# Altium PCB main_2.PcbDoc
Units mil, origin at the board's own origin, x right, y up, seen from the top; angles counter-clockwise.
Board outline 6000 x 4000 mil, 2 copper layers (Top Layer, Bottom Layer); 82 components, 163 nets, 538 pads, 14 vias.
Unrouted connection lines stored in the file: 2.
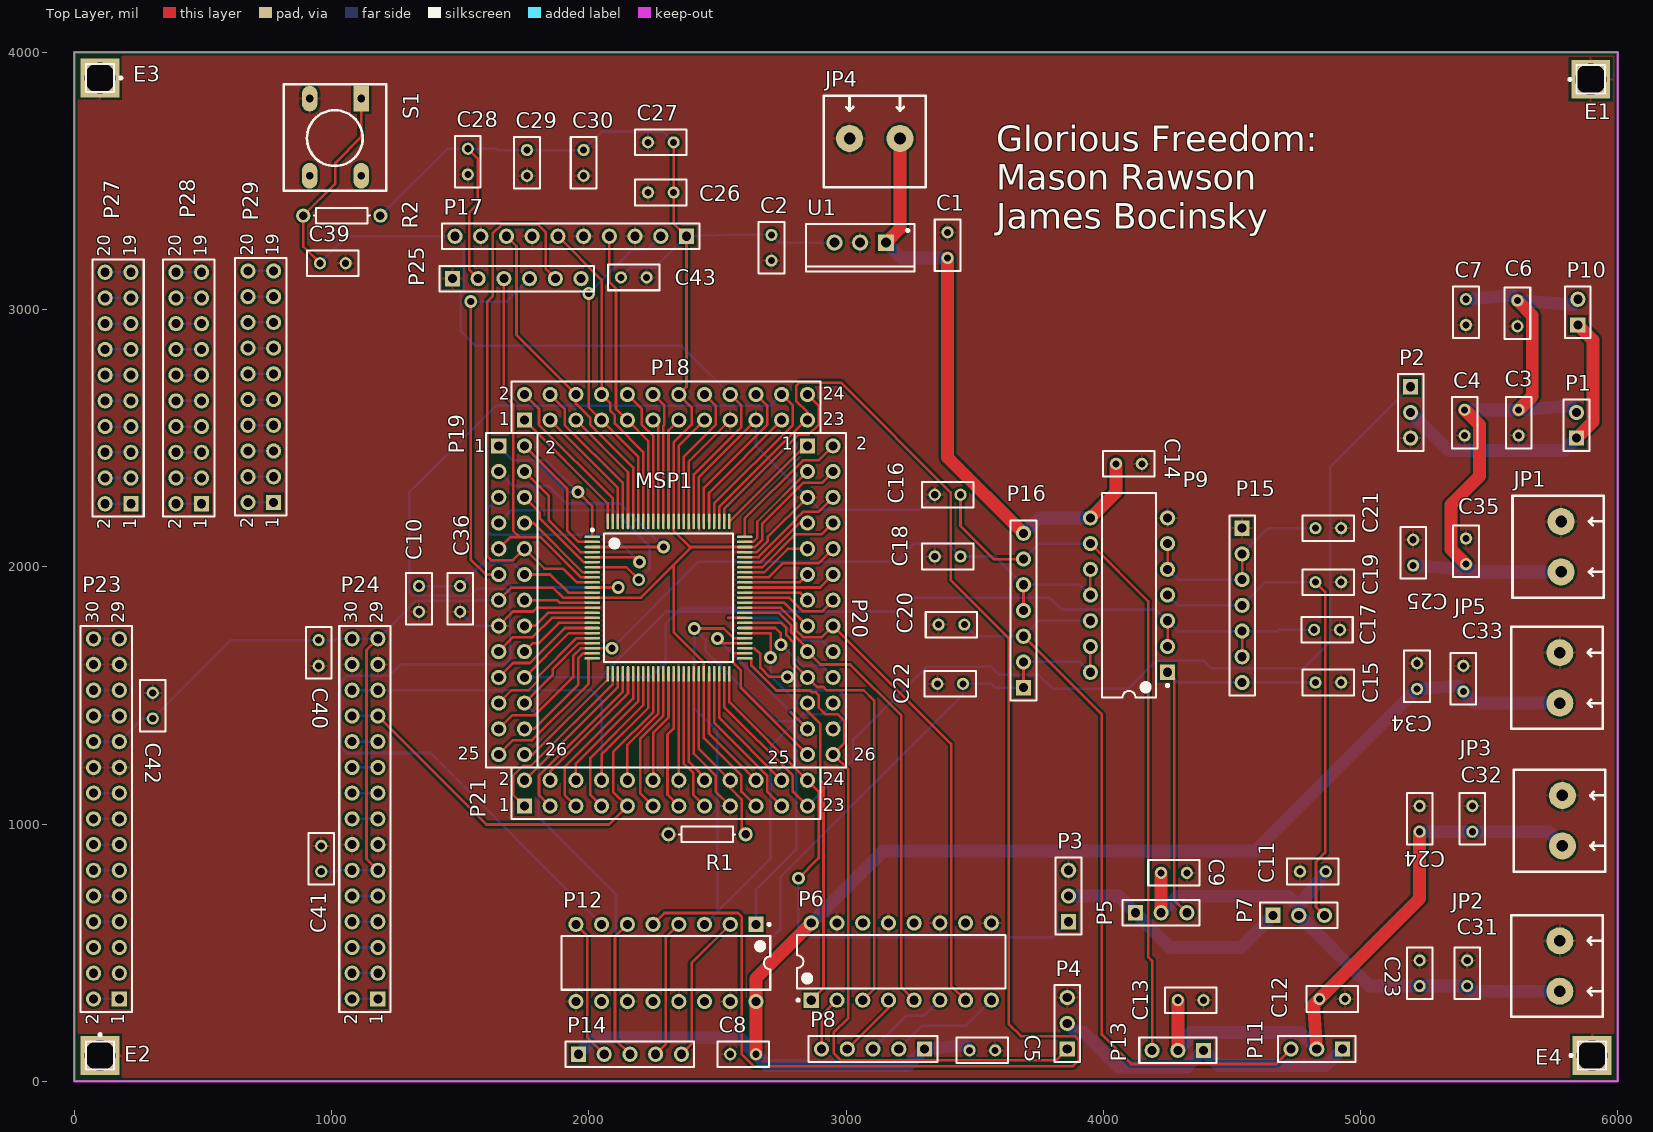
[diagram p0: Top Layer view]
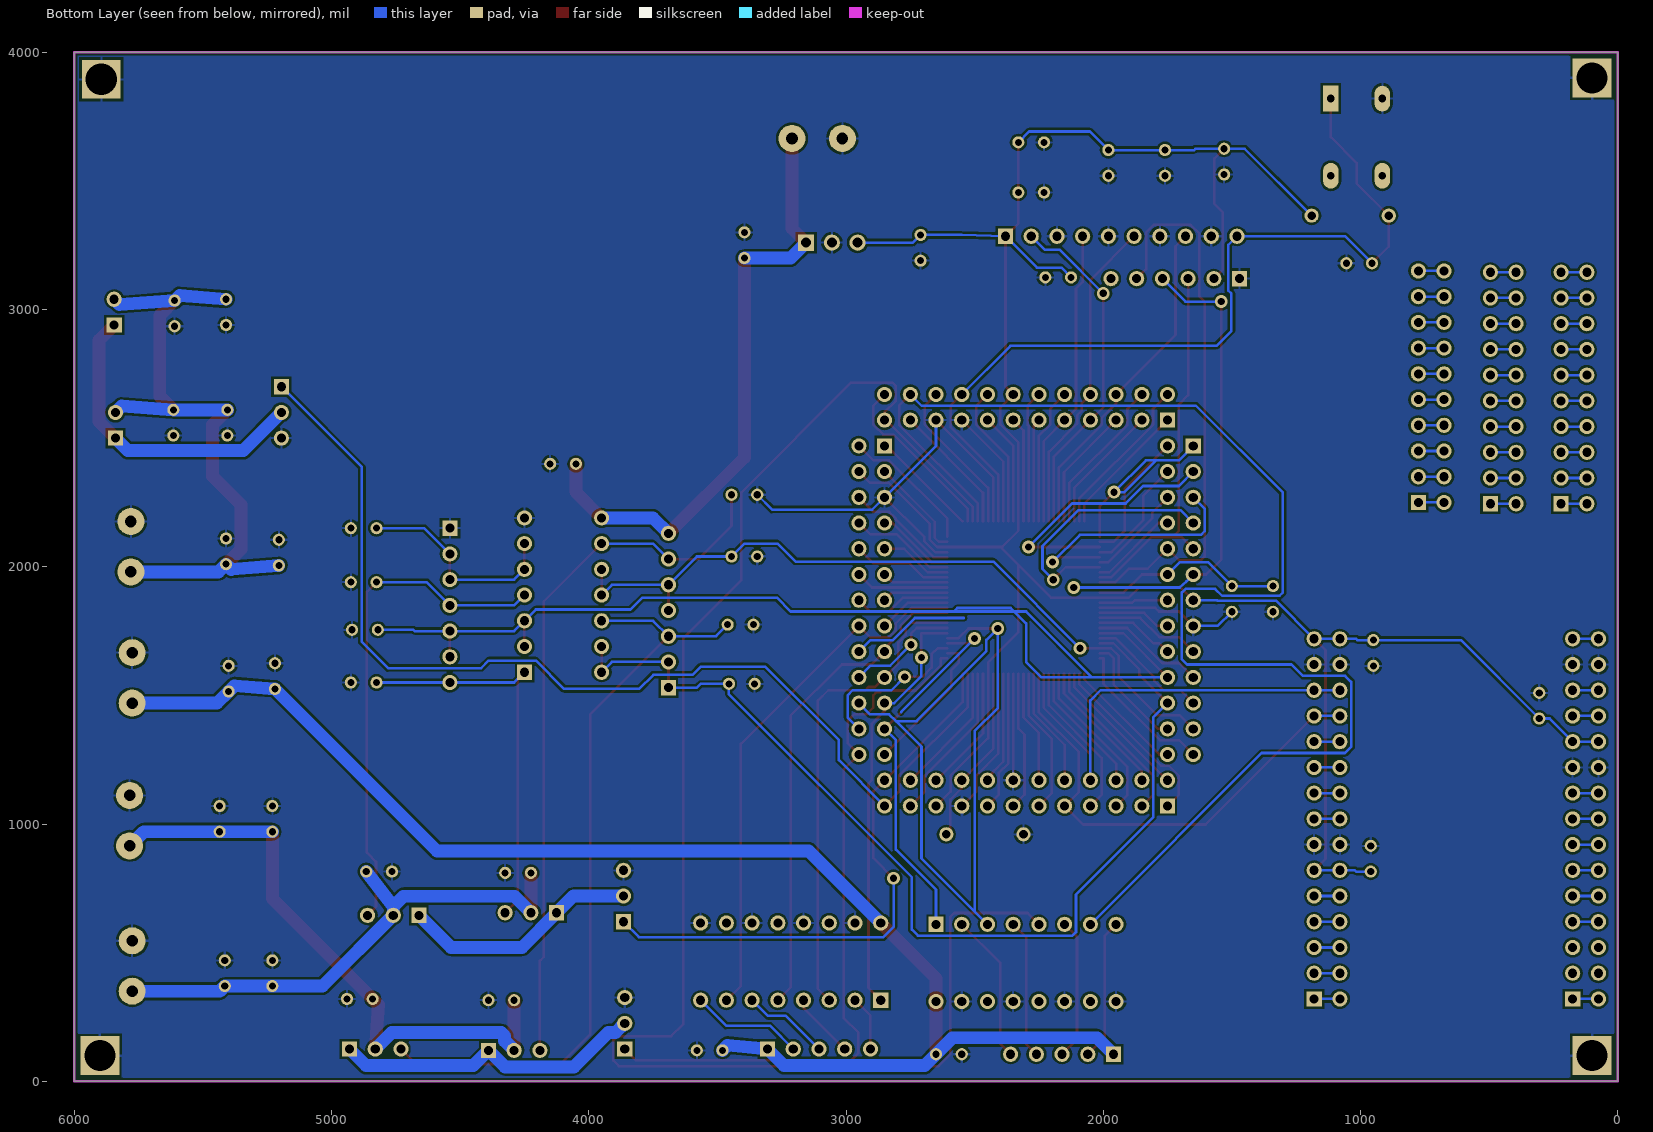
[diagram p1: Bottom Layer view, seen from below]

## Layer stack, top to bottom
Top Solder: solder mask 0.4, Solder Resist, Dk 3.5
Top Layer: signal copper 1.4
Dielectric 1: dielectric 12.6, FR-4, Dk 4.8
Bottom Layer: signal copper 1.4
Bottom Solder: solder mask 0.4, Solder Resist, Dk 3.5

## Board outline
0,0 6000,0 6000,4000 0,4000

## Design rules (kind name [scope] priority, off if disabled: settings)
Clearance CopperPour [inPolyGon] p1: gap=9
Clearance [All] p2: gap=9
ComponentClearance [All] p1: gap=-1 collisioncheckmode=3 verticalgap=10 showdistances=TRUE
PolygonConnect [All] p1: connectstyle=Relief reliefconductorwidth=10 reliefentries=4 polygonreliefangle="90 Angle" airgapwidth=10
RoutingVias [All] p1: holewidth=28 width=50 viastyle="Through Hole" minholewidth=28 minwidth=50 maxholewidth=28 maxwidth=50
SolderMaskExpansion [All] p1: expansion=4
Width "Schematic Width Constraint_6" [InNet('6V_S')] p1: maxlimit=50 minlimit=50 preferedwidth=50
Width "Schematic Width Constraint_5" [InNet('6V_1_F')] p2: maxlimit=50 minlimit=50 preferedwidth=50
Width "Schematic Width Constraint_3" [InNet('6V_1')] p3: maxlimit=50 minlimit=50 preferedwidth=50
Width "Schematic Width Constraint_2" [InNet('6V_0_F')] p4: maxlimit=50 minlimit=50 preferedwidth=50
Width "Schematic Width Constraint_1" [InNet('4V5_F')] p5: maxlimit=50 minlimit=50 preferedwidth=50
Width "Schematic Width Constraint" [InNet('4V5')] p6: maxlimit=50 minlimit=50 preferedwidth=50
Width "Schematic Width Constraint_7" [InNet('6V_L')] p7: maxlimit=50 minlimit=50 preferedwidth=50
Width "Schematic Width Constraint_4" [InNet('6V_0')] p8: maxlimit=50 minlimit=50 preferedwidth=50
Width [All] p9: maxlimit=10 minlimit=9 preferedwidth=10
29 further rules are at their usual default settings.

## Classes and differential pairs
component class power: C1 C2 C3 C4 C5 C6 C7 C8 C9 C11 C12 C13 C14 C15 C16 C17 C18 C19 C20 C21 C22 C23 C24 C25 C31 C32 C33 C34 C35 JP1 JP2 JP3 JP4 JP5 P1 P2 P3 P4 P5 P6 P7 P8 P9 P10 P11 P12 P13 P14 U1
component class logic: C10 C26 C27 C28 C29 C30 C36 C39 MSP1 R1 R2 S1
component class comm: C40 C41 C42 C43 P23 P24 P25
component class breakout: E1 E2 E3 E4 P15 P16 P17 P18 P19 P20 P21 P27 P28 P29

## Components (designator, comment, footprint, x,y, rotation, side; value= is the part's Value field where it differs from the comment)
C1 "Cap2" RAD-0.1 3395,3250 r90 top
C2 "Cap2" RAD-0.1 2710,3240 r270 top
C3 "Cap" RAD-0.1 5615,2560 r90 top
C4 "Cap" RAD-0.1 5405,2560 r270 top
C5 "Cap" RAD-0.1 3530,120 r180 top
C6 "Cap" RAD-0.1 5610,2985 r90 top
C7 "Cap" RAD-0.1 5410,2990 r270 top
C8 "Cap" RAD-0.1 2600,105 r0 top
C9 "Cap" RAD-0.1 4275,810 r180 top
C10 "Cap" RAD-0.1 1340,1875 r90 top
C11 "Cap" RAD-0.1 4815,815 r0 top
C12 "Cap" RAD-0.1 4890,320 r180 top
C13 "Cap" RAD-0.1 4340,315 r180 top
C14 "Cap" RAD-0.1 4100,2400 r180 top
C15 "Cap" RAD-0.1 4875,1550 r0 top
C16 "Cap" RAD-0.1 3395,2280 r0 top
C17 "Cap" RAD-0.1 4870,1755 r0 top
C18 "Cap" RAD-0.1 3395,2040 r0 top
C19 "Cap" RAD-0.1 4875,1940 r0 top
C20 "Cap" RAD-0.1 3410,1775 r0 top
C21 "Cap" RAD-0.1 4875,2150 r0 top
C22 "Cap" RAD-0.1 3405,1545 r0 top
C23 "Cap" RAD-0.1 5230,420 r270 top
C24 "Cap" RAD-0.1 5230,1020 r270 top
C25 "Cap" RAD-0.1 5205,2055 r270 top
C26 "Cap" RAD-0.1 2280,3455 r0 top
C27 "Cap" RAD-0.1 2280,3650 r0 top
C28 "Cap" RAD-0.1 1530,3575 r90 top
C29 "Cap" RAD-0.1 1760,3570 r90 top
C30 "Cap" RAD-0.1 1980,3570 r90 top
C31 "Cap" RAD-0.1 5415,420 r270 top
C32 "Cap" RAD-0.1 5435,1020 r270 top
C33 "Cap" RAD-0.1 5400,1565 r270 top
C34 "Cap" RAD-0.1 5220,1575 r270 top
C35 "Cap" RAD-0.1 5410,2060 r270 top
C36 "Cap" RAD-0.1 1500,1875 r90 top
C39 "Cap" RAD-0.1 1005,3180 r180 top
C40 "Cap" RAD-0.1 950,1665 r90 top
C41 "Cap" RAD-0.1 960,865 r270 top
C42 "Cap" RAD-0.1 305,1460 r270 top
C43 "Cap" RAD-0.1 2174.98,3125 r180 top
E1 "mount" PIN1 5895,3895 r90 top
E2 "mount" PIN1 100,100 r0 top
E3 "mount" PIN1 100,3900 r270 top
E4 "mount" PIN1 5900,100 r90 top
JP1 "gunPower" CON2screw 5780,1980 r90 top
JP2 "turretPower_0" CON2screw 5775,350 r90 top
JP3 "turretPower_1" CON2screw 5785,915 r90 top
JP4 "logicPower" CON2screw 3210,3665 r180 top
JP5 "stepperPower" CON2screw 5775,1470 r90 top
MSP1 "MSP432" PZ100_L 2310,1880 r0 top
P1 "gun_0" HDR1X2 5840,2500 r90 top
P2 "gunFet" HDR1X3 5195,2700 r270 top
P3 "turrFet_0" HDR1X3 3865,620 r90 top
P4 "turrFet_1" HDR1X3 3860,125 r90 top
P5 "pt_0" HDR1X3 4125,655 r0 top
P6 "ULN2003_0" DIP-16 3215,465 r90 top
P7 "pt_1" HDR1X3 4660,645 r0 top
P8 "stepper_0" HDR1X5 3305,125 r180 top
P9 "PWM_driver" DIP-14 4100,1890 r180 top
P10 "gun_1" HDR1X2 5845,2940 r90 top
P11 "pt_2" HDR1X3 4930,125 r180 top
P12 "ULN2003_1" DIP-16 2300,460 r270 top
P13 "pt_3" HDR1X3 4390,120 r180 top
P14 "stepper_1" HDR1X5 1960,105 r0 top
P15 "pwm_header_0" HDR1X7 4540,2150 r270 top
P16 "pwm_header_1" HDR1X7 3690,1530 r90 top
P17 "Programmer" HDR1X10 2379.98,3285 r180 top
P18 "Header 12X2" HDR2X12 1750,2570 r0 top
P19 "Header 13X2" HDR2X13 1650,2470 r270 top
P20 "Header 13X2" HDR2X13 2850,2470 r270 top
P21 "Header 12X2" HDR2X12 1750,1070 r0 top
P23 "wifi_L" HDR2X15 175,320 r90 top
P24 "wifi_R" HDR2X15 1180,320 r90 top
P25 "spi_bbgw" HDR1X6 1469.98,3120 r0 top
P27 "proto_0" HDR2X10 220,2245 r90 top
P28 "proto_1" HDR2X10 495,2245 r90 top
P29 "proto_2" HDR2X10 775,2250 r90 top
R1 "Res1" AXIAL-0.3 2460,960 r0 top
R2 "Res1" AXIAL-0.3 1040,3365 r0 top
S1 "SW-PB" "SW PB" 1115,3820 r270 top
U1 "LM2940CT-3.3" T03B 3055,3260 r180 top

## Footprints (in the part's own frame and the unit in brackets; to place one, negate y for a bottom-side part, rotate by r counter-clockwise, add the part's x,y. Pads: shape width x height; smd on the part's side, far side on the other; paste and mask are expansions set on the pad)
AXIAL-0.3 [mm] "Axial Device, Thru-Hole; 2 Leads; 0.3 in Pin Spacing"
  round 1.4 hole 0.85: 1(-3.81,0) 2(3.81,0)
  silkscreen extent -2.77,-0.76 2.77,0.76
CON2screw [mil]
  round 105 hole 45: 1(0,0) 2(196,0)
  silkscreen extent -100,-166 296,189
DIP-14 [mm] "DIP; 14 Leads; Row Spacing 7.62 mm; Pitch 2.54 mm"
  rect 1.5x1.5 hole 0.9: 1(-3.81,7.62)
  round 1.5 hole 0.9: 2(-3.81,5.08) 3(-3.81,2.54) 4(-3.81,0) 5(-3.81,-2.54) 6(-3.81,-5.08) 7(-3.81,-7.62) 8(3.81,-7.62) 9(3.81,-5.08) 10(3.81,-2.54) 11(3.81,0) 12(3.81,2.54) 13(3.81,5.08) 14(3.81,7.62)
  silkscreen extent -3.94,-10.1 2.65,10.1, body extent -3.6,-10.1 3.6,10.1, height 5.08
DIP-16 [mm] "DIP; 16 Leads; Row Spacing 7.62 mm; Pitch 2.54 mm"
  rect 1.5x1.5 hole 0.9: 1(-3.81,8.89)
  round 1.5 hole 0.9: 2(-3.81,6.35) 3(-3.81,3.81) 4(-3.81,1.27) 5(-3.81,-1.27) 6(-3.81,-3.81) 7(-3.81,-6.35) 8(-3.81,-8.89) 9(3.81,-8.89) 10(3.81,-6.35) 11(3.81,-3.81) 12(3.81,-1.27) 13(3.81,1.27) 14(3.81,3.81) 15(3.81,6.35) 16(3.81,8.89)
  silkscreen extent -3.93,-10.3 2.65,10.31, body extent -3.6,-10.28 3.6,10.28, height 5.08
HDR1X2 [mm] "Connector; Header; 2 Position"
  rect 1.5x1.5 hole 0.9: 1(0,0)
  round 1.5 hole 0.9: 2(2.54,0)
  silkscreen extent -1.27,-1.27 3.81,1.27
HDR1X3 [mm] "Connector; Header; 3 Position"
  rect 1.5x1.5 hole 0.9: 1(0,0)
  round 1.5 hole 0.9: 2(2.54,0) 3(5.08,0)
  silkscreen extent -1.27,-1.27 6.35,1.27
HDR1X5 [mm] "Connector; Header; 5 Position"
  rect 1.5x1.5 hole 0.9: 1(0,0)
  round 1.5 hole 0.9: 2(2.54,0) 3(5.08,0) 4(7.62,0) 5(10.16,0)
  silkscreen extent -1.27,-1.27 11.43,1.27
HDR1X6 [mm] "Connector; Header; 6 Position"
  rect 1.5x1.5 hole 0.9: 1(0,0)
  round 1.5 hole 0.9: 2(2.54,0) 3(5.08,0) 4(7.62,0) 5(10.16,0) 6(12.7,0)
  silkscreen extent -1.27,-1.27 13.97,1.27
HDR1X7 [mm] "Connector; Header; 7 Position"
  rect 1.5x1.5 hole 0.9: 1(0,0)
  round 1.5 hole 0.9: 2(2.54,0) 3(5.08,0) 4(7.62,0) 5(10.16,0) 6(12.7,0) 7(15.24,0)
  silkscreen extent -1.27,-1.27 16.51,1.27
HDR1X10 [mm] "Connector; Header; 10 Position"
  rect 1.5x1.5 hole 0.9: 1(0,0)
  round 1.5 hole 0.9: 2(2.54,0) 3(5.08,0) 4(7.62,0) 5(10.16,0) 6(12.7,0) 7(15.24,0) 8(17.78,0) 9(20.32,0) 10(22.86,0)
  silkscreen extent -1.27,-1.27 24.13,1.27
HDR2X10 [mm] "Connector; Header; 10x2 Position"
  rect 1.5x1.5 hole 0.9: 1(0,0)
  round 1.5 hole 0.9: 2(0,2.54) 3(2.54,0) 4(2.54,2.54) 5(5.08,0) 6(5.08,2.54) 7(7.62,0) 8(7.62,2.54) 9(10.16,0) 10(10.16,2.54) 11(12.7,0) 12(12.7,2.54) 13(15.24,0) 14(15.24,2.54) 15(17.78,0) 16(17.78,2.54) 17(20.32,0) 18(20.32,2.54) 19(22.86,0) 20(22.86,2.54)
  silkscreen extent -1.27,-1.27 24.13,3.81
HDR2X12 [mm] "Connector; Header; 12x2 Position"
  rect 1.5x1.5 hole 0.9: 1(0,0)
  round 1.5 hole 0.9: 2(0,2.54) 3(2.54,0) 4(2.54,2.54) 5(5.08,0) 6(5.08,2.54) 7(7.62,0) 8(7.62,2.54) 9(10.16,0) 10(10.16,2.54) 11(12.7,0) 12(12.7,2.54) 13(15.24,0) 14(15.24,2.54) 15(17.78,0) 16(17.78,2.54) 17(20.32,0) 18(20.32,2.54) 19(22.86,0) 20(22.86,2.54) 21(25.4,0) 22(25.4,2.54) 23(27.94,0) 24(27.94,2.54)
  silkscreen extent -1.27,-1.27 29.21,3.81
HDR2X13 [mm] "Connector; Header; 13x2 Position"
  rect 1.5x1.5 hole 0.9: 1(0,0)
  round 1.5 hole 0.9: 2(0,2.54) 3(2.54,0) 4(2.54,2.54) 5(5.08,0) 6(5.08,2.54) 7(7.62,0) 8(7.62,2.54) 9(10.16,0) 10(10.16,2.54) 11(12.7,0) 12(12.7,2.54) 13(15.24,0) 14(15.24,2.54) 15(17.78,0) 16(17.78,2.54) 17(20.32,0) 18(20.32,2.54) 19(22.86,0) 20(22.86,2.54) 21(25.4,0) 22(25.4,2.54) 23(27.94,0) 24(27.94,2.54) 25(30.48,0) 26(30.48,2.54)
  silkscreen extent -1.27,-1.27 31.75,3.81
HDR2X15 [mm] "Connector; Header; 15x2 Position"
  rect 1.5x1.5 hole 0.9: 1(0,0)
  round 1.5 hole 0.9: 2(0,2.54) 3(2.54,0) 4(2.54,2.54) 5(5.08,0) 6(5.08,2.54) 7(7.62,0) 8(7.62,2.54) 9(10.16,0) 10(10.16,2.54) 11(12.7,0) 12(12.7,2.54) 13(15.24,0) 14(15.24,2.54) 15(17.78,0) 16(17.78,2.54) 17(20.32,0) 18(20.32,2.54) 19(22.86,0) 20(22.86,2.54) 21(25.4,0) 22(25.4,2.54) 23(27.94,0) 24(27.94,2.54) 25(30.48,0) 26(30.48,2.54) 27(33.02,0) 28(33.02,2.54) 29(35.56,0) 30(35.56,2.54)
  silkscreen extent -1.27,-1.27 36.83,3.81
PIN1 [mm] "Generic Antenna; 1 Lead"
  rect 3.81x3.81 hole 3.1: 1(0,0)
  silkscreen extent -1.4,-1.4 1.4,2.17
PZ100_L [mm] "100-Pin Thin Quad Flat Pack 0.5 mm Pitch, IPC High Density"
  oval 1.55x0.25 smd: 1(-7.525,6) 2(-7.525,5.5) 3(-7.525,5) 4(-7.525,4.5) 5(-7.525,4) 6(-7.525,3.5) 7(-7.525,3) 8(-7.525,2.5) 9(-7.525,2) 10(-7.525,1.5) 11(-7.525,1) 12(-7.525,0.5) 13(-7.525,0) 14(-7.525,-0.5) 15(-7.525,-1) 16(-7.525,-1.5) 17(-7.525,-2) 18(-7.525,-2.5) 19(-7.525,-3) 20(-7.525,-3.5) 21(-7.525,-4) 22(-7.525,-4.5) 23(-7.525,-5) 24(-7.525,-5.5) 25(-7.525,-6) 51(7.525,-6) 52(7.525,-5.5) 53(7.525,-5) 54(7.525,-4.5) 55(7.525,-4) 56(7.525,-3.5) 57(7.525,-3) 58(7.525,-2.5) 59(7.525,-2) 60(7.525,-1.5) 61(7.525,-1) 62(7.525,-0.5) 63(7.525,0) 64(7.525,0.5) 65(7.525,1) 66(7.525,1.5) 67(7.525,2) 68(7.525,2.5) 69(7.525,3) 70(7.525,3.5) 71(7.525,4) 72(7.525,4.5) 73(7.525,5) 74(7.525,5.5) 75(7.525,6)
  oval 0.25x1.55 smd: 26(-6,-7.525) 27(-5.5,-7.525) 28(-5,-7.525) 29(-4.5,-7.525) 30(-4,-7.525) 31(-3.5,-7.525) 32(-3,-7.525) 33(-2.5,-7.525) 34(-2,-7.525) 35(-1.5,-7.525) 36(-1,-7.525) 37(-0.5,-7.525) 38(0,-7.525) 39(0.5,-7.525) 40(1,-7.525) 41(1.5,-7.525) 42(2,-7.525) 43(2.5,-7.525) 44(3,-7.525) 45(3.5,-7.525) 46(4,-7.525) 47(4.5,-7.525) 48(5,-7.525) 49(5.5,-7.525) 50(6,-7.525) 76(6,7.525) 77(5.5,7.525) 78(5,7.525) 79(4.5,7.525) 80(4,7.525) 81(3.5,7.525) 82(3,7.525) 83(2.5,7.525) 84(2,7.525) 85(1.5,7.525) 86(1,7.525) 87(0.5,7.525) 88(0,7.525) 89(-0.5,7.525) 90(-1,7.525) 91(-1.5,7.525) 92(-2,7.525) 93(-2.5,7.525) 94(-3,7.525) 95(-3.5,7.525) 96(-4,7.525) 97(-4.5,7.525) 98(-5,7.525) 99(-5.5,7.525) 100(-6,7.525)
  silkscreen extent -7.65,-6.35 6.35,6.8, body extent -7,-7 7,7, height 1.6
RAD-0.1 [mm] "Radial Cap, Thru-Hole; 2 Leads; 0.1 in Pin Spacing"
  round 1.2 hole 0.7: 1(-1.27,0) 2(1.27,0)
  silkscreen extent -2.54,-1.27 2.54,1.27
"SW PB" [mil]
  rect 100x60 hole 30: 1(0,0)
  oval 100x60 hole 30: 2(0,-200) 3(300,-200) 4(300,0)
  silkscreen extent -55,-302 358,98
T03B [mm]
  rect 1.6x1.6 hole 1: 1(-2.54,0)
  round 1.6 hole 1: 2(0,0) 3(2.54,0)
  silkscreen extent -5.35,-1.85 5.35,2.85, body extent -5.4,-1.9 5.4,2.9, height 19.4

## Part data
C1 C2 C3 C4 C5 C6 C7 C8 C9 C10 C11 C12 C13 C14 C15 C16 C17 C18 C19 C20 C21 C22 C23 C24 C25 C26 C27 C28 C29 C30 C31 C32 C33 C34 C35 C36 C39 C40 C41 C42 C43: "Capacitor"
E1 E2 E3 E4: library part Antenna, "Generic Antenna"
JP1 JP2 JP3 JP4 JP5: library part Power
P1 P10: library part "Header 2", "Header, 2-Pin"
P2 P3 P4 P5 P7 P11 P13: library part "Header 3", "Header, 3-Pin"
P6 P12: library part "Header 8X2", "Header, 8-Pin, Dual row"
P8 P14: library part "Header 5", "Header, 5-Pin"
P9: library part "Header 7X2A", "Header, 7-Pin, Dual row"
P15 P16: library part "Header 7", "Header, 7-Pin"
P17: library part "Header 10", "Header, 10-Pin"
P18 P21: "Header, 12-Pin, Dual row"
P19 P20: "Header, 13-Pin, Dual row"
P23 P24: library part "Header 15X2", "Header, 15-Pin, Dual row"
P25: library part "Header 6", "Header, 6-Pin"
P27 P28 P29: library part "Header 10X2", "Header, 10-Pin, Dual row"
R1 R2: "Resistor"
S1: library part SW-PB_2, "DIGIKEY SW400-ND"
U1: library part LM2940CT-5.0, "1A Low Dropout Regulator, 3-pin TO-220"

## Via types
v1: diameter 50, hole 28, Top Layer to Bottom Layer, 14 vias

## Nets (pads, with @x,y where several pads share a name; then routed paths per layer and width w, separated by ;. In a path a pad name is that pad's centre, name@x,y a point inside that pad or via, vN(x,y) a via of type N, cw(c..) or ccw(c..) an arc to the next point about the centre after c; other vN are vias at no path point)
4V5: C3.2 C4.1 C6.2 C7.1 C25.2 C35.2 JP1.1 P1.2 P10.2 | length 2660.2
  Top Layer w50: C4.1 5463,2552 5463,2352 5352,2241 5352,2068 C35.2 ; C6.2 5668,2977 5668,2663 C3.2
  Bottom Layer w50: C25.2 5390,1990 C35.2 5440,1980 JP1.1 ; C4.1 C3.2 5815.5,2624.5 P1.2 ; C7.1 5590,3055 C6.2 5824,3019 P10.2
4V5_F: P1.1 P2.2 P10.1 | length 1217.1
  Top Layer w50: P1.1 5904,2564 5904,2881 P10.1
  Bottom Layer w50: P2.2 5343,2452 5792,2452 P1.1
6V_0: C9.2 C11.2 C23.2 C31.2 JP2.1 P5.2 P7.2 | length 2076.1
  Top Layer w50: P5.2 C9.2
  Bottom Layer w50: P5.2 4289,719 4720,719 4760,679 ; C11.2 4760,679 ; JP2.1 5435,350 C31.2 C23.2 5035,370 P7.2 4760,679
6V_0_F: P3.2 P5.1 P7.1 | length 929.6
  Bottom Layer w50: P3.2 4060,720 P5.1 4260,520 4535,520 P7.1
6V_1: C12.2 C13.2 C24.2 C32.2 JP3.1 P11.2 P13.2 | length 2395.3
  Top Layer w50: P13.2 C13.2 ; P11.2 4817.5,297.5 C12.2 5230,710 C24.2
  Bottom Layer w50: P13.2 4327,157 4327,176 4340,189 4766,189 P11.2 ; C24.2 C32.2 5730,970 JP3.1
6V_1_F: P4.2 P11.1 P13.1 | length 1217.5
  Bottom Layer w50: P4.2 3896,189 3924,189 4057,56 4326,56 P13.1 4449,61 4866,61 P11.1
6V_L: C1.1 C14.2 JP4.1 P9.8 P16.7 U1.1 | length 2421.1
  Top Layer w50: U1.1 3210,3315 JP4.1 ; C1.1 3395,2425 P16.7 ; P9.8 4050,2290 C14.2
  Bottom Layer w50: U1.1 3215,3200 C1.1 ; P16.7 3750,2190 P9.8
6V_S: C5.2 C8.2 C33.2 C34.2 JP5.1 P6.16 P8.1 P12.16 P14.1 | length 5541.2
  Top Layer w50: C8.2 P12.16 2650,400 P6.16
  Bottom Layer w50: P14.1 2024,169 2586,169 C8.2 2694,61 3241,61 P8.1 3460,140 C5.2 ; P6.16 3145,895 4590,895 C34.2 5377.5,1537.5 C33.2 5445,1470 JP5.1
BBGW_CS: P25.6
BBGW_MISO: MSP1.11 P19.11 P25.4 | length 1986.5
  Top Layer w10: v1(1541,3031) 1541,2029 1600,1970 P19.11 ; MSP1.11 v1(2114.37,1919.37)
  Bottom Layer w10: v1(1541,3031) 1680.98,3031 P25.4 ; P19.11 1676.75,1943.25 1703.3,1919.37 v1(2114.37,1919.37)
BBGW_MOSI: MSP1.10 P19.10 P25.5 | length 2177.7
  Top Layer w10: P25.5 1833,3156.98 1833,3300 1804,3329 1660,3329 1626,3295 1626,3051 1606,3031 1606,2040 1620,2026 1706,2026 P19.10 1827,1993 1900.33,1993 1954.28,1939.06 MSP1.10
BBGW_SCLK: MSP1.9 P19.9 P25.3 | length 1478
  Top Layer w10: P19.9 1694,2114 1732,2114 ; P25.3 1669.98,2667 1706,2630.98 1706,2140 1732,2114 ; MSP1.9 1969.39,1958.74 1814.13,2114 1732,2114
CLK: P23.17 P23.18 | length 100
  Bottom Layer w10: P23.18 P23.17
GPIO_GUN: MSP1.49 P2.1 P21.23 | length 4207.4
  Top Layer w10: MSP1.49 2526.54,1455.02 2793.53,1188.03 2793.53,1126.47 P21.23
  Bottom Layer w10: P21.23 3028,1248 3028,1326 3314,1612 3564,1612 3596,1580 3749,1580 3804,1525 4096,1525 4206,1635 4389,1635 4418,1606 4780,1606 4882,1708 4882,2387 P2.1
GPIO_TURR_0: MSP1.50 P3.1 P21.24 | length 2251.5
  Top Layer w10: MSP1.50 2546.22,1473.78 P21.24 2893.53,1126.47 2893.53,867.53 v1(2815,789)
  Bottom Layer w10: v1(2815,789) 2815,600 2855,560 3805,560 P3.1
GPIO_TURR_1: MSP1.51 P4.1 P20.26 | length 2828.2
  Top Layer w10: MSP1.51 2632,1643.78 2632,1616 2729,1519 2861,1519 2867,1513 2881,1513 2894,1500 2894,1452 2920,1426 2968,1426 2994,1400 2994,1314 P20.26 3009,1211 3009,246 2952,189 2952,109 2980,81 3816,81 P4.1
MSP_PWM_0: C17.1 MSP1.20 P9.2 P9.3 P15.5 P15.6 P19.20 | length 4531
  Top Layer w10: P19.20 1922.2,1742.2 MSP1.20 ; P9.2 P9.3 ; P15.6 P15.5
  Bottom Layer w10: P19.20 2044,1570 ; C17.1 4682,1755 4677,1750 P15.5 4290,1750 P9.3 4206,1834 3838,1834 3792,1880 3269,1880 3215,1826 2580.5,1826 ; 2044,1570 2240,1570 2300,1630 2300,1779.76 2346.24,1826 ; 2044,1570 2300,1826 2346.24,1826 ; 2346.24,1826 2580.5,1826 ; 2346.24,1826 2360,1839.76 2566.74,1839.76 2580.5,1826
MSP_PWM_1: MSP1.21 P19.21 | length 478.4
  Top Layer w10: P19.21 1700,1520 1766.48,1520 1801.68,1555.2 1801.68,1572.31 1951.89,1722.52 MSP1.21
MSP_PWM_2: C22.2 MSP1.22 P9.13 P9.14 P16.1 P16.2 P19.22 | length 4031.4
  Top Layer w10: P19.22 1859.26,1579.26 1859.26,1601.06 1961.03,1702.83 MSP1.22 ; P16.1 P16.2 ; P9.14 P9.13
  Bottom Layer w10: P19.22 1806,1414 1806,1026 2106,726 2106,580 2120,566 2720,566 2744,590 2744,793 3455,1504 C22.2 3565,1545 3580,1530 P16.1 ; P16.2 3910,1630 P9.14
MSP_PWM_3: C18.2 MSP1.23 P9.10 P9.11 P16.4 P16.5 P19.23 | length 2929.5
  Top Layer w10: P19.23 1703.02,1423.02 1791.3,1423.02 1939.34,1571.07 1939.34,1653.66 1968.84,1683.15 MSP1.23 v1(2090,1683.15) ; P16.4 P16.5 ; P9.11 P9.10
  Bottom Layer w10: v1(2090,1683.15) 2426.85,2020 3196,2020 3266,2090 3395,2090 C18.2 3580,2040 P16.5 3910,1930 P9.11
P1: MSP1.1 P19.1 | length 795.2
  Top Layer w10: v1(1958,2290) 2014,2234 2014,2116.22 MSP1.1
  Bottom Layer w10: P19.1 1706,2414 1794,2414 ; 1794,2414 1834,2414 v1(1958,2290) 1918,2290 1794,2414
P1.0_LED1: MSP1.4 P19.4 | length 449
  Top Layer w10: P19.4 1845,2275 1845,2180 1967.83,2057.17 MSP1.4
P1.1_BUTTON1: MSP1.5 P19.5 | length 982.3
  Top Layer w10: MSP1.5 2177.52,2037.48 v1(2197,2018)
  Bottom Layer w10: P19.5 1606,2226 1606,2138 1620,2124 2091,2124 v1(2197,2018)
P1.2_BCLUART_RXD: MSP1.6 P19.6 | length 381
  Top Layer w10: P19.6 1810,2210 1810,2188.13 1980.33,2017.8 MSP1.6
P1.3_BCLUART_TXD: MSP1.7 P19.7 | length 1013
  Top Layer w10: MSP1.7 2146.1,1998.11 v1(2194.5,1949.72)
  Bottom Layer w10: P19.7 1700,2220 2096,2220 2236,2080 2236,1991.22 v1(2194.5,1949.72)
P1.4_BUTTON2: MSP1.8 P19.8 | length 343.1
  Top Layer w10: P19.8 1785,2170 1976.57,1978.43 MSP1.8
P2: MSP1.2 P19.2 | length 514.2
  Top Layer w10: P19.2 1917,2303 1917,2139.54 1960,2096.54 MSP1.2
P2.0_RGBLED_RED: MSP1.16 P19.16 | length 284.8
  Top Layer w10: P19.16 1790.36,1770 1841.31,1820.94 MSP1.16
P2.1_RGBLED_GREEN: MSP1.17 P19.17 | length 418.1
  Top Layer w10: P19.17 1706.21,1726.21 1781.21,1726.21 1856.26,1801.26 MSP1.17
P2.2_RGBLED_BLUE: MSP1.18 P19.18 | length 310
  Top Layer w10: P19.18 1781.88,1701.88 1804.59,1701.88 1884.28,1781.57 MSP1.18
P2.3_IO_J4.34: MSP1.19 P19.19 | length 443.2
  Top Layer w10: P19.19 1706,1626 1770.99,1626 1906.88,1761.89 MSP1.19
P3: MSP1.3 P19.3 | length 1037.7
  Top Layer w10: MSP1.3 v1(2290,2076.85)
  Bottom Layer w10: P19.3 1706,2314 1845,2314 1913,2246 2120.85,2246 v1(2290,2076.85)
P3.0_IO_J2.18: MSP1.32 P21.6 | length 513.9
  Top Layer w10: P21.6 1950,1235 2191.89,1476.89 MSP1.32
P3.1_BCLUART_RTS: MSP1.33 P21.7 | length 616.7
  Top Layer w10: P21.7 2006.47,1113.53 2006.47,1256.47 2211.57,1461.57 MSP1.33
P3.2_URXD_J1.3: MSP1.34 P21.8 P24.25 P24.26 | length 1785.4
  Top Layer w10: P21.8 2050,1270 2231.26,1451.26 MSP1.34
  Bottom Layer w10: P24.26 P24.25 2010,1520 2050,1480 P21.8
P3.3_UTXD_J1.4: MSP1.35 P21.9 P24.23 P24.24 | length 1875.7
  Top Layer w10: P24.23 1602,998 2078,998 P21.9 2095,1125 2095,1280 2250.94,1435.94 MSP1.35
  Bottom Layer w10: P24.24 P24.23
P3.4_BCLUART_CTS: MSP1.36 P21.10 | length 463.7
  Top Layer w10: P21.10 2150,1308.13 2270.63,1428.76 MSP1.36
P3.5_IO_J4.32: MSP1.37 P21.11 | length 571.9
  Top Layer w10: P21.11 2200,1120 2200,1331.26 2290.32,1421.58 MSP1.37
P3.6_IO_J2.11: MSP1.38 P21.12 | length 438.6
  Top Layer w10: P21.12 2250,1354.39 2310,1414.39 MSP1.38
P3.7_IO_J4.31: MSP1.39 P21.13 | length 541.8
  Top Layer w10: MSP1.39 2329.69,1371 2306,1347.31 2306,1114 P21.13
P4.0_A13_J3.24: MSP1.56 P6.1 P20.21 | length 1653.8
  Top Layer w10: MSP1.56 2706.93,1741.27 v1(2706.93,1647.6) ; P20.21 2850,1438.47 2900,1388.47 2900,1170 2912.53,1157.47 2912.53,362.53 P6.1
  Bottom Layer w10: v1(2706.93,1647.6) 2706.93,1575.52 2812.45,1470 P20.21
P4.1_IO_J1.5: MSP1.57 P20.20 | length 448.3
  Top Layer w10: MSP1.57 2725,1761.89 2747,1739.89 v1(2747,1697)
  Bottom Layer w10: v1(2747,1697) 2827.99,1616.01 2903.99,1616.01 P20.20
P4.2_A11_J3.25: MSP1.58 P6.3 P20.19 | length 1875.3
  Top Layer w10: MSP1.58 2748.43,1781.57 2768,1762 2768,1734.33 2796.38,1705.95 2796.38,1623.62 P20.19 2887.47,1532.53 2912.53,1532.53 2925.06,1520 3069,1520 3109,1480 3109,359 P6.3
P4.3_A10_J1.6: MSP1.59 P20.18 | length 717.4
  Top Layer w10: 2542,1801.26 MSP1.59
  Bottom Layer w10: 2541.5,1800.76 2732.24,1800.76 ; 2542,1801.26 2731.74,1801.26 2732.24,1800.76 ; P20.18 2906,1714 2819,1714 2732.24,1800.76
P4.4_A9_J3.26: MSP1.60 P6.5 P20.17 | length 1924.5
  Top Layer w10: MSP1.60 2739.06,1820.94 2787.47,1772.53 2787.47,1744.1 2850,1681.57 P20.17 2900,1620 3016,1620 3215,1421 3215,365 P6.5
P4.5_A8_J3.27: MSP1.61 P6.7 P20.16 | length 2094
  Top Layer w10: MSP1.61 2746.24,1840.63 2806.47,1780.4 2806.47,1751.97 2831.97,1726.47 2906.47,1726.47 P20.16 3409,1311 3409,371 P6.7
P4.6_IO_J1.8: MSP1.62 P20.15 | length 281.2
  Top Layer w10: MSP1.62 2759.68,1860.32 P20.15
P4.7_A6_J3.28: MSP1.63 P20.14 | length 383.9
  Top Layer w10: MSP1.63 2778.44,1880 2831.97,1826.47 2906.47,1826.47 P20.14
P5.0_IO_J2.13: MSP1.64 P20.13 | length 256
  Top Layer w10: MSP1.64 2820.31,1899.69 P20.13
P5.1_IO_J4.33: MSP1.65 P20.12 | length 364.7
  Top Layer w10: MSP1.65 2899.37,1919.37 P20.12
P5.2_IO_J2.12: MSP1.66 P20.11 | length 256.6
  Top Layer w10: MSP1.66 2819.06,1939.06 P20.11
P5.3: MSP1.67 P20.10 | length 389.8
  Top Layer w10: MSP1.67 2698.74,1958.74 2753.53,2013.53 2893.53,2013.53 P20.10
P5.4_IO_J3.29: MSP1.68 P20.9 | length 281.7
  Top Layer w10: MSP1.68 2682.17,1978.43 2773.74,2070 P20.9
P5.5_IO_J3.30: MSP1.69 P20.8 | length 414.9
  Top Layer w10: MSP1.69 2674.98,1998.11 2803.34,2126.47 2906.47,2126.47 P20.8
P5.6_PWM_J4.37: MSP1.70 P20.7 | length 306.8
  Top Layer w10: MSP1.70 2667.8,2017.8 2820,2170 P20.7
P5.7_IO_J2.17: MSP1.71 P20.6 | length 442.7
  Top Layer w10: MSP1.71 2660.48,2037.48 2806.47,2183.47 2806.47,2188.03 2831.97,2213.53 2893.53,2213.53 P20.6
P6.0_A15_J1.2: MSP1.54 P12.1 P20.23 | length 1451.2
  Top Layer w10: v1(2501,1721) 2519.17,1702.83 MSP1.54 ; 2786,1434 P20.23
  Bottom Layer w10: v1(2501,1721) 2786,1436 2786,1434 ; P12.1 2650,745 2806,901 2806,1326 P20.23
P6.1_A14_J3.23: MSP1.55 P12.3 P20.22 | length 3030.4
  Top Layer w10: v1(2410,1760) 2524.75,1760 2562.23,1722.52 MSP1.55
  Bottom Layer w10: P12.3 2500,660 ; P20.22 2906,1426 2832,1426 2806,1400 ; 2500,660 2500,1361 2410,1451 v1(2410,1760) 2454,1716 2454,1672 2726,1400 2806,1400 ; 2500,660 2706.47,866.47 2706.47,1300.47 2806,1400
P6.2: MSP1.76 P20.1 | length 425.5
  Top Layer w10: MSP1.76 2839.96,2470 P20.1
P6.3: MSP1.77 P18.24 | length 687.5
  Top Layer w10: MSP1.77 2526.54,2225.39 2814.67,2513.53 2855.09,2513.53 2893.53,2551.97 2893.53,2626.47 P18.24
P6.4_I2CSDA_J1.10: MSP1.78 P12.5 P18.23 | length 6251.8
  Top Layer w10: P12.5 2294,654 2580,654 2594,640 2594,105 2640,59 3883,59 3904,80 3904,161 3890,175 3680,175 3632,223 3632,1723 3407,1948 3407,2289 2980,2716 2820,2716 2806,2702 2806,2645 2850,2601 P18.23 2844.28,2570 2506.85,2232.57 MSP1.78
P6.5_I2CSCL_J1.9: MSP1.79 P12.7 P18.22 | length 5553.2
  Top Layer w10: MSP1.79 2487.17,2245.61 2793.53,2551.97 2793.53,2626.47 P18.22
  Bottom Layer w10: P12.7 1384,1276 1060,1276 1036,1300 1036,1552 1060,1576 1224,1576 1268,1620 1674,1620 1694,1640 1694,1900 1680,1914 1564.62,1914 1538,1887.38 1314.62,1887.38 1302,1900 1302,2288 1640,2626 2706,2626 P18.22
P6.6_CAPTURE_J4.36: MSP1.80 P18.21 | length 510.8
  Top Layer w10: MSP1.80 2467.48,2287.48 P18.21
P6.7_CAPTURE_J4.35: MSP1.81 P18.20 | length 613.6
  Top Layer w10: MSP1.81 2447.8,2306.24 2693.53,2551.97 2693.53,2626.47 P18.20
P7.0: MSP1.88 P18.13 | length 410.3
  Top Layer w10: MSP1.88 2310,2530 P18.13
P7.1: MSP1.89 P18.12 | length 513.1
  Top Layer w10: P18.12 2293.53,2626.47 2293.53,2551.97 2290.32,2548.76 MSP1.89
P7.2: MSP1.90 P18.11 | length 402.3
  Top Layer w10: P18.11 2270.63,2549.37 MSP1.90
P7.3: MSP1.91 P18.10 | length 535.6
  Top Layer w10: P18.10 2206.47,2613.53 2206.47,2551.97 2250.94,2507.5 MSP1.91
P7.4: MSP1.26 P19.26 | length 466.5
  Top Layer w10: P19.26 1781.78,1270 2073.78,1562 MSP1.26
P7.5: MSP1.27 P21.1 | length 710.2
  Top Layer w10: P21.1 1706.47,1113.53 1706.47,1188.03 1744.92,1226.47 1775.82,1226.47 2093.46,1544.12 MSP1.27
P7.6: MSP1.28 P21.2 | length 564.2
  Top Layer w10: P21.2 2113.15,1533.15 MSP1.28
P7.7: MSP1.29 P21.3 | length 667
  Top Layer w10: P21.3 1806.47,1113.53 1806.47,1188.03 2132.83,1514.39 MSP1.29
P8.0: MSP1.30 P21.4 | length 539
  Top Layer w10: P21.4 1850,1204.69 2152.52,1507.21 MSP1.30
P8.1: MSP1.31 P21.5 | length 641.8
  Top Layer w10: P21.5 1906.47,1113.53 1906.47,1221.47 2172.2,1487.2 MSP1.31
P8.2: MSP1.46 P21.20 | length 489.3
  Top Layer w10: MSP1.46 2467.48,1352.52 P21.20
P8.3: MSP1.47 P21.21 | length 622.6
  Top Layer w10: MSP1.47 2487.17,1394.39 2693.53,1188.03 2693.53,1126.47 P21.21
P8.4: MSP1.48 P21.22 | length 514.5
  Top Layer w10: MSP1.48 2506.85,1413.15 P21.22
P9.0: MSP1.52 P20.25 | length 558.4
  Top Layer w10: MSP1.52 2561,1663.46 2561,1627 2590.97,1597.03 2590.97,1529.03 P20.25
P9.1: MSP1.53 P20.24 | length 642.4
  Top Layer w10: MSP1.53 2643.85,1683.15 2667,1660 2667,1607.87 2702.87,1572 v1(2772,1572)
  Bottom Layer w10: v1(2772,1572) 2824,1520 2974,1520 2994,1500 2994,1414 P20.24
P9.2: MSP1.74 P20.3 | length 393.6
  Top Layer w10: MSP1.74 2638.93,2096.54 2655,2112.61 2655,2175 P20.3
P9.3: MSP1.75 P20.2 | length 532.2
  Top Layer w10: MSP1.75 2606.26,2187.82 2831.97,2413.53 2893.53,2413.53 P20.2
P9.4: MSP1.96 P18.5 | length 477.6
  Top Layer w10: P18.5 2152.52,2367.48 MSP1.96
P9.5: MSP1.97 P18.4 | length 610.9
  Top Layer w10: P18.4 1906.47,2613.53 1906.47,2551.97 2132.83,2325.61 MSP1.97
P9.6: MSP1.98 P18.3 | length 502.7
  Top Layer w10: P18.3 2113.15,2306.85 MSP1.98
P9.7: MSP1.99 P18.2 | length 636
  Top Layer w10: P18.2 1806.47,2613.53 1806.47,2551.97 2093.46,2264.98 MSP1.99
P10.0: MSP1.100 P18.1 | length 527.9
  Top Layer w10: P18.1 2073.78,2246.22 MSP1.100
P10.4: MSP1.24 P19.24 | length 445.5
  Top Layer w10: P19.24 1787.52,1370 1958.34,1540.83 1958.34,1643.66 1978.15,1663.46 MSP1.24
P10.5: MSP1.25 P19.25 | length 576.4
  Top Layer w10: P19.25 1706,1326 1780,1326 1999,1545 1999,1643.78 MSP1.25
P12: C10.2 C36.2 MSP1.12 P19.12 | length 761.3
  Top Layer w10: P19.12 1850.19,1970 1920.5,1899.69 MSP1.12
  Bottom Layer w10: C10.2 C36.2 1593,2018 1702,2018 P19.12
P13: C2.1 C26.2 C27.2 C28.2 C29.2 C30.2 C40.2 C41.2 C42.2 C43.2 MSP1.13 MSP1.45 MSP1.73 MSP1.87 P17.1 P18.14 P19.13 P20.4 P21.19 P23.21 P23.22 P24.11 P24.12 P24.29 P24.30 P25.2 R2.2 U1.3 | length 10049
  Top Layer w10: P24.11 1136,864 1136,1676 P24.29 ; C28.2 1568,3587 1568,3411 1536,3379 1536,3153.98 P25.2 ; P19.13 1698,1918 1862,1918 1900,1880 MSP1.13 2203.15,1880 2329.69,2006.54 ; C27.2 C26.2 2330,3334.98 P17.1 2379.98,2699.98 P18.14 2400,2620 2400,2552.77 2329.69,2482.46 MSP1.87 2329.69,2140 2392.84,2076.85 2400,2076.85 ; P21.19 2593.53,1126.47 2593.53,1188.03 2447.8,1333.76 MSP1.45 2447.8,1628.2 2329.69,1746.31 2329.69,2006.54 ; P20.4 2906.47,2326.47 2833.34,2326.47 2674,2167.13 2674,2104.74 2646.11,2076.85 MSP1.73 2400,2076.85 ; 2329.69,2006.54 2400,2076.85
  Bottom Layer w10: P23.22 P23.21 265,1410 C42.2 610,1715 C40.2 1012,1715 1017,1720 P24.30 P24.29 1328.38,1868.38 1556.62,1868.38 1558.24,1870 P19.13 ; C41.2 1017,815 1022,820 P24.12 P24.11 ; R2.2 1450,3625 C28.2 1642,3625 1647,3620 C29.2 C30.2 2052,3692 2288,3692 C27.2 ; C43.2 2162.98,3163 2257.98,3163 P17.1 2550,3290 C2.1 2740,3260 U1.3
P14: MSP1.14 P19.14 | length 267.8
  Top Layer w10: P19.14 1877,1870 1886.68,1860.32 MSP1.14
P15: C1.2 C2.2 C3.1 C4.2 C5.1 C6.1 C7.2 C8.1 C9.1 C10.1 C11.1 C12.1 C13.1 C14.1 C15.2 C16.1 C17.2 C18.1 C19.2 C20.1 C21.2 C22.1 C23.1 C24.1 C25.1 C26.1 C27.1 C28.1 C29.1 C30.1 C31.1 C32.1 C33.1 C34.1 C35.1 C36.1 C39.1 C40.1 C41.1 C42.1 C43.1 E1.1 E2.1 E3.1 E4.1 JP1.2 JP2.2 JP3.2 JP4.2 JP5.2 MSP1.15 MSP1.40 MSP1.43 MSP1.72 MSP1.82 MSP1.84 P2.3 P3.3 P4.3 P6.9 P6.11 P6.13 P6.15 P9.7 P12.9 P12.11 P12.13 P12.15 P15.1 P17.3 P17.5 P17.7 P17.9 P18.17 P18.19 P19.15 P20.5 P21.14 P21.17 P23.19 P23.20 P23.27 P23.28 P24.13 P24.14 P24.27 P24.28 P25.1 R1.1 S1.2 U1.2 | length 3761.4
  Top Layer w10: P19.15 1706,1826 1784,1826 1798.63,1840.63 MSP1.15 ; MSP1.40 2349.37,1170.63 P21.14 ; MSP1.84 2388.74,2408.74 P18.17 ; MSP1.43 2408.43,1273.13 2493.53,1188.03 2493.53,1126.47 P21.17 ; MSP1.82 2428.11,2348.11 P18.19 ; MSP1.72 2653.3,2057.17 2695,2098.87 2695,2115 P20.5
  Bottom Layer w10: C36.1 1555,1770 P19.15 ; P18.19 2650,2470 P20.5 2898,2222 3287,2222 C16.1
P41: MSP1.41 P21.15 | length 547.3
  Top Layer w10: MSP1.41 2369.06,1235.69 2406.47,1198.27 2406.47,1113.53 P21.15
P42: MSP1.42 P21.16 | length 436.5
  Top Layer w10: MSP1.42 2388.74,1242.87 2425.47,1206.14 P21.16
P44: MSP1.44 P21.18 R1.2 | length 699.1
  Top Layer w10: MSP1.44 2428.11,1291.89 P21.18 2550,1140 2594,1096 2594,976 R1.2
P83: C39.2 MSP1.83 P17.10 P18.18 R2.1 S1.1 | length 3454.4
  Top Layer w10: C39.2 890,3245 R2.1 1015,3490 1015,3570 1115,3670 S1.1 ; MSP1.83 2408.43,2358.67 2593.53,2543.77 2593.53,2626.47 P18.18
  Bottom Layer w10: C39.2 1060,3285 P17.10 1514,3250.98 1514,3074 1502,3062 1502,2917 1560,2859 2361,2859 P18.18
P85: MSP1.85 P18.16 | length 563.3
  Top Layer w10: MSP1.85 2369.06,2427.5 2493.53,2551.97 2493.53,2626.47 P18.16
P86: MSP1.86 P18.15 | length 435.4
  Top Layer w10: MSP1.86 2349.37,2469.37 P18.15
P92: MSP1.92 P17.4 P18.9 | length 1171.4
  Top Layer w10: P17.4 2079.98,3107.02 2106,3081 2106,2614 P18.9 2231.26,2488.74 MSP1.92
P93: MSP1.93 P17.6 P18.8 | length 1246.1
  Top Layer w10: P17.6 2050,3114.98 P18.8 2083.35,2636.65 2083.35,2607.47 2101.77,2589.05 2101.77,2556.67 2211.57,2446.87 MSP1.93
P94: MSP1.94 P17.2 P18.7 | length 1338.2
  Top Layer w10: v1(2000,3063) 2000,2620 P18.7 2191.89,2428.11 MSP1.94
  Bottom Layer w10: v1(2000,3063) 2170,3233 2227.98,3233 P17.2
P95: MSP1.95 P17.8 P18.6 | length 1312.6
  Top Layer w10: P17.8 1719,3245.98 1719,2901 P18.6 1950,2634.46 2006.47,2577.99 2006.47,2551.97 2172.2,2386.24 MSP1.95
PROTO_0: P27.1 P27.2 | length 100
  Bottom Layer w10: P27.2 P27.1
PROTO_1: P27.3 P27.4 | length 100
  Bottom Layer w10: P27.4 P27.3
PROTO_2: P27.5 P27.6 | length 100
  Bottom Layer w10: P27.6 P27.5
PROTO_3: P27.7 P27.8 | length 100
  Bottom Layer w10: P27.8 P27.7
PROTO_4: P27.9 P27.10 | length 100
  Bottom Layer w10: P27.10 P27.9
PROTO_5: P27.11 P27.12 | length 100
  Bottom Layer w10: P27.12 P27.11
PROTO_6: P27.13 P27.14 | length 100
  Bottom Layer w10: P27.14 P27.13
PROTO_7: P27.15 P27.16 | length 100
  Bottom Layer w10: P27.16 P27.15
PROTO_8: P27.17 P27.18 | length 100
  Bottom Layer w10: P27.18 P27.17
PROTO_9: P27.19 P27.20 | length 100
  Bottom Layer w10: P27.20 P27.19
PROTO_10: P28.1 P28.2 | length 100
  Bottom Layer w10: P28.2 P28.1
PROTO_11: P28.3 P28.4 | length 100
  Bottom Layer w10: P28.4 P28.3
PROTO_12: P28.5 P28.6 | length 100
  Bottom Layer w10: P28.6 P28.5
PROTO_13: P28.7 P28.8 | length 100
  Bottom Layer w10: P28.8 P28.7
PROTO_14: P28.9 P28.10 | length 100
  Bottom Layer w10: P28.10 P28.9
PROTO_15: P28.11 P28.12 | length 100
  Bottom Layer w10: P28.12 P28.11
PROTO_16: P28.13 P28.14 | length 100
  Bottom Layer w10: P28.14 P28.13
PROTO_17: P28.15 P28.16 | length 100
  Bottom Layer w10: P28.16 P28.15
PROTO_18: P28.17 P28.18 | length 100
  Bottom Layer w10: P28.18 P28.17
PROTO_19: P28.19 P28.20 | length 100
  Bottom Layer w10: P28.20 P28.19
PROTO_20: P29.1 P29.2 | length 100
  Bottom Layer w10: P29.2 P29.1
PROTO_21: P29.3 P29.4 | length 100
  Bottom Layer w10: P29.4 P29.3
PROTO_22: P29.5 P29.6 | length 100
  Bottom Layer w10: P29.6 P29.5
PROTO_23: P29.7 P29.8 | length 100
  Bottom Layer w10: P29.8 P29.7
PROTO_24: P29.9 P29.10 | length 100
  Bottom Layer w10: P29.10 P29.9
PROTO_25: P29.11 P29.12 | length 100
  Bottom Layer w10: P29.12 P29.11
PROTO_26: P29.13 P29.14 | length 100
  Bottom Layer w10: P29.14 P29.13
PROTO_27: P29.15 P29.16 | length 100
  Bottom Layer w10: P29.16 P29.15
PROTO_28: P29.17 P29.18 | length 100
  Bottom Layer w10: P29.18 P29.17
PROTO_29: P29.19 P29.20 | length 100
  Bottom Layer w10: P29.20 P29.19
PWM_0: C15.1 P5.3 P9.1 P15.7 | length 1557.6
  Top Layer w10: P9.1 4276,1564 4276,704 P5.3
  Bottom Layer w10: P9.1 4290,1550 P15.7 C15.1
PWM_1: C19.1 P7.3 P9.4 P15.4 | length 1968.2
  Top Layer w10: C19.1 4863,1902 4863,889 4827,853 4827,678 P7.3
  Bottom Layer w10: P9.4 4290,1850 P15.4 4630,1940 C19.1
PWM_2: C20.2 P9.12 P11.3 P16.3 | length 3015.1
  Top Layer w10: P16.3 3995,1425 3995,181 4109,67 4672,67 P11.3
  Bottom Layer w10: C20.2 3505,1730 P16.3 3750,1790 P9.12
PWM_3: C16.2 P9.9 P13.3 P16.6 | length 2773.7
  Top Layer w10: C16.2 3445,2159 3574,2030 P16.6 ; P9.9 4175,1865 4175,483 4190,468 P13.3
  Bottom Layer w10: P16.6 3750,2090 P9.9
PWM_H_5: C21.1 P9.5 P9.6 P15.2 P15.3 | length 833
  Top Layer w10: P9.5 P9.6 ; P15.3 P15.2
  Bottom Layer w10: P9.5 4290,1950 P15.3 ; P15.2 4640,2150 C21.1
S_0_BLUE: P6.2 P8.5 | length 214.9
  Top Layer w10: P8.5 2905,255 P6.2
S_0_ORG: P6.8 P8.2 | length 438.7
  Bottom Layer w10: P8.2 3296,216 3466,216 P6.8
S_0_PINK: P6.4 P8.4 | length 256.3
  Top Layer w10: P8.4 3165,285 P6.4
S_0_YEL: P6.6 P8.3 | length 338.7
  Bottom Layer w10: P8.3 3234,254 3304,254 P6.6
S_1_BLUE: P12.2 P14.5 | length 583.7
  Top Layer w10: P14.5 2400,145 2400,460 P12.2
S_1_ORG: P12.8 P14.2 | length 550.6
  Top Layer w10: P12.8 1994,566 1994,171 P14.2
S_1_PINK: P12.4 P14.4 | length 542.3
  Top Layer w10: P14.4 2300,145 2300,560 P12.4
S_1_YEL: P12.6 P14.3 | length 548.9
  Top Layer w10: P12.6 2102,562 2102,163 P14.3
WIFI_A0: P23.1 P23.2 | length 100
  Bottom Layer w10: P23.2 P23.1
WIFI_CMD: P23.13 P23.14 | length 100
  Bottom Layer w10: P23.14 P23.13
WIFI_D0: P24.1 P24.2 | length 100
  Bottom Layer w10: P24.2 P24.1
WIFI_D1: P24.3 P24.4 | length 100
  Bottom Layer w10: P24.4 P24.3
WIFI_D2: P24.5 P24.6 | length 100
  Bottom Layer w10: P24.6 P24.5
WIFI_D3: P24.7 P24.8 | length 100
  Bottom Layer w10: P24.8 P24.7
WIFI_D4: P24.9 P24.10 | length 100
  Bottom Layer w10: P24.10 P24.9
WIFI_D5: P24.15 P24.16 | length 100
  Bottom Layer w10: P24.16 P24.15
WIFI_D6: P24.17 P24.18 | length 100
  Bottom Layer w10: P24.18 P24.17
WIFI_D7: P24.19 P24.20 | length 100
  Bottom Layer w10: P24.20 P24.19
WIFI_D8: P24.21 P24.22 | length 100
  Bottom Layer w10: P24.22 P24.21
WIFI_EN: P23.23 P23.24 | length 100
  Bottom Layer w10: P23.24 P23.23
WIFI_RST: P23.25 P23.26 | length 100
  Bottom Layer w10: P23.26 P23.25
WIFI_SD0: P23.15 P23.16 | length 100
  Bottom Layer w10: P23.16 P23.15
WIFI_SD1: P23.11 P23.12 | length 100
  Bottom Layer w10: P23.12 P23.11
WIFI_SD2: P23.9 P23.10 | length 100
  Bottom Layer w10: P23.10 P23.9
WIFI_SD3: P23.7 P23.8 | length 100
  Bottom Layer w10: P23.8 P23.7
WIFI_VIN: P23.29 P23.30 | length 100
  Bottom Layer w10: P23.30 P23.29
pads on no net: P6.10 P6.12 P6.14 P12.10 P12.12 P12.14 P23.3 P23.4 P23.5 P23.6 S1.3 S1.4

## Polygon pours and split planes (outlines as drawn)
P15 on Top Layer "topGnd" (solid, pour order 6): 0,0 0,4000 6000,4000 6000,0 0,0
P15 on Bottom Layer "Bottom Layer-No Net" (solid, pour order 8): 0,0 0,4000 6000,4000 6000,0 0,0

## Keep-outs
Keep-Out Layer:
  the board outline again, w10

## Silkscreen, mask and mechanical layers (free items; w line width, h text height)
Top Overlay:
  text "Glorious Freedom:  / Mason Rawson / James Bocinsky" at 3585,3315 h100

## Text inside footprints (layer, text, board x,y; h text height)
P18: Top Overlay "1" at 1650,2550 h50; Top Overlay "2" at 1650,2650 h50; Top Overlay "23" at 2910,2550 h50; Top Overlay "24" at 2910,2650 h50
P19: Top Overlay "2" at 1830,2440 h50; Top Overlay "1" at 1555,2445 h50; Top Overlay "25" at 1490,1250 h50; Top Overlay "26" at 1830,1265 h50
P20: Top Overlay "2" at 3040,2455 h50; Top Overlay "1" at 2750,2455 h50; Top Overlay "25" at 2695,1235 h50; Top Overlay "26" at 3030,1245 h50
P21: Top Overlay "1" at 1650,1050 h50; Top Overlay "2" at 1650,1150 h50; Top Overlay "23" at 2910,1050 h50; Top Overlay "24" at 2910,1150 h50
P23: Top Overlay "1" at 195,220 h50 r90; Top Overlay "2" at 95,220 h50 r90; Top Overlay "29" at 195,1780 h50 r90; Top Overlay "30" at 95,1780 h50 r90
P24: Top Overlay "1" at 1200,220 h50 r90; Top Overlay "2" at 1100,220 h50 r90; Top Overlay "29" at 1200,1780 h50 r90; Top Overlay "30" at 1100,1780 h50 r90
P27: Top Overlay "20" at 140,3205 h50 r90; Top Overlay "19" at 240,3205 h50 r90; Top Overlay "1" at 240,2145 h50 r90; Top Overlay "2" at 140,2145 h50 r90
P28: Top Overlay "20" at 415,3205 h50 r90; Top Overlay "19" at 515,3205 h50 r90; Top Overlay "1" at 515,2145 h50 r90; Top Overlay "2" at 415,2145 h50 r90
P29: Top Overlay "20" at 695,3210 h50 r90; Top Overlay "19" at 795,3210 h50 r90; Top Overlay "1" at 795,2150 h50 r90; Top Overlay "2" at 695,2150 h50 r90